# EAGLE board ext_rgb_L (EAGLE 9.6.2)
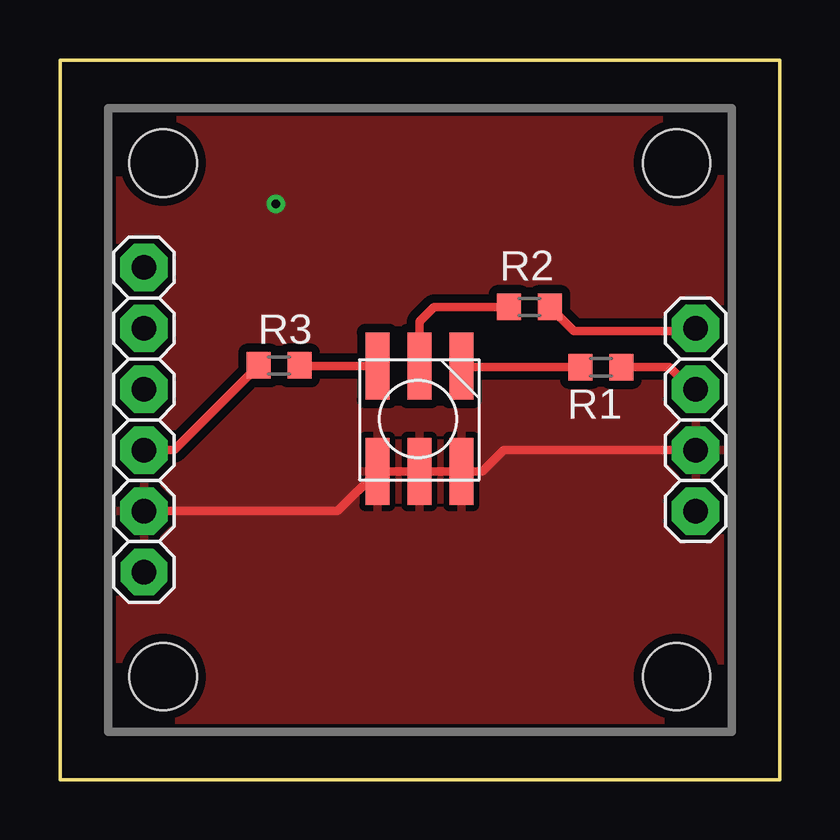
[diagram p0: board, top side]
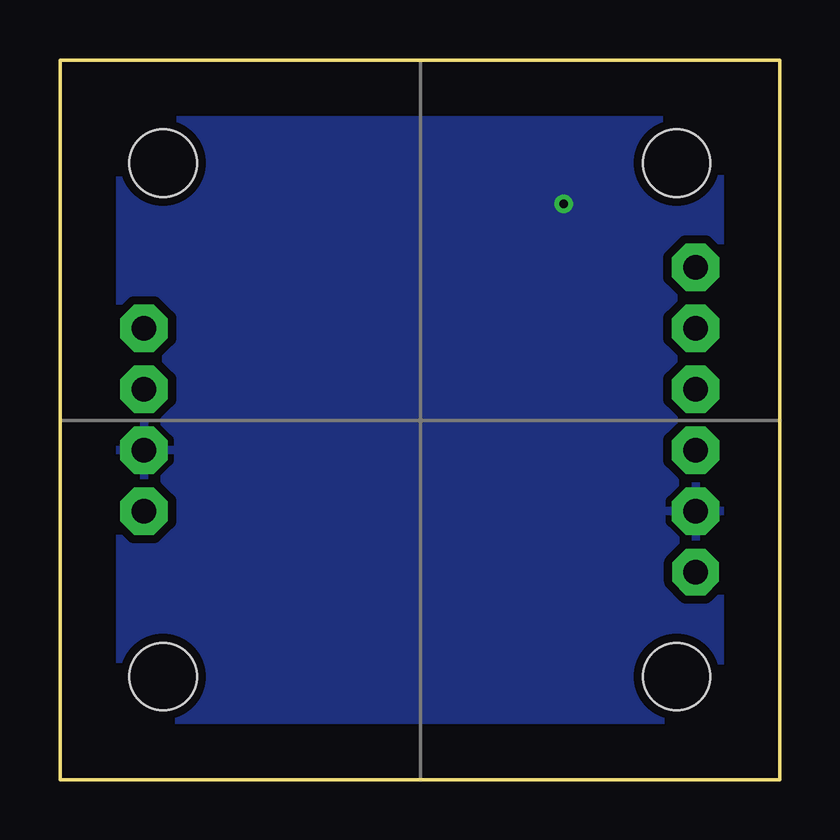
[diagram p1: board, bottom side, seen from below]

Size 30 x 30 mm. Coordinates in mm from the lower left corner, seen from the top.
Outline: 0,0 0,30 30,30 30,0 0,0
Copper layers (1*16): Top 0.035mm / dielectric 1.5mm / Bottom 0.035mm
Design rules "default *": minimum track width 14mil, minimum drill 0.35mm, track to track 14mil, track to pad 13mil, pad to pad 10mil, via to via 14mil, smd to smd 14mil, copper to edge 15mil, drill to drill 15mil, minimum pad ring 10mil, minimum via ring 8mil, stop-mask expansion 4mil, vias tented up to drill 0mil, thermal gap 10mil
Holes 2.8 mm at 4.3,4.3 25.7,25.7 25.7,4.3 4.3,25.7

## Footprints (pad centres in the part's own frame; a part is rotated, then mirrored left to right if it is on the bottom)
1X04 = drill 1.016 pad 1.981 octagon: 1 -3.81,0; 2 -1.27,0; 3 1.27,0; 4 3.81,0
1X06 = drill 1.016 pad 1.93 octagon: 1 -6.35,0 | drill 1.016 pad 1.981 octagon: 2 -3.81,0; 3 -1.27,0; 4 1.27,0; 5 3.81,0; 6 6.35,0
R0603 = smd 1 x 1.1: 1 -0.85,0; 2 0.85,0
RGB_WW-FCE50TC-Q1 = smd 1 x 2.8: 1 -1.778,-2.286; 2 -0.028,-2.286; 3 1.722,-2.286; 4 -1.778,2.114; 5 -0.028,2.114; 6 1.722,2.114

## Placement (x,y rotation side)
JP1  [1X04]  26.5,15 270 top
JP2  [1X06]  3.5,15 90 top
R1  [R0603]  22.55,17.19 180 top
R2  [R0603]  19.57,19.7 180 top
R3  [R0603]  9.14,17.27 0 top
U$2  RGB_WW-FCE50TC-Q1  [RGB_WW-FCE50TC-Q1]  14.95,14.95 180 top

## Library data of the parts
JP1 JP2 = pinhead2
R1-R3 = resistor
U$2 = !stavebnice03

## Nets
GND: JP1.3 JP2.2 U$2.4 U$2.5 U$2.6
N$1: R1.2 U$2.1
N$2: R3.2 U$2.3
N$3: R2.2 U$2.2
N$4: JP1.1 R2.1
N$5: JP1.2 R1.1
P4: JP2.3 R3.1

## Tracks (layer width: path | path; a pad name or v marks a point on that pad's centre or on a via)
GND  (via drill 0.35)
  Top 0.356: JP1.3 18.5,13.73 17.61,12.84 U$2.4 U$2.5 U$2.6 11.58,11.19 JP2.2
  other vias: 9,24
  pour Top: 2.5,27.5 27.5,27.5 27.5,2.5 2.5,2.5
  pour Bottom: 2.5,27.5 27.5,27.5 27.5,2.5 2.5,2.5
N$1
  Top 0.356: R1.2 16.78,17.19 U$2.1
N$2
  Top 0.356: R3.2 10.01,17.24 U$2.3
N$3
  Top 0.356: R2.2 15.59,19.7 14.98,19.1 U$2.2
N$4
  Top 0.356: JP1.1 26.39,18.7 21.42,18.7 R2.1
N$5
  Top 0.356: JP1.2 26.32,16.27 25.4,17.19 R1.1
P4
  Top 0.356: JP2.3 4.75,13.73 R3.1

## Text on the board
bDocu: GND | GND | VCC | VCC